# Altium PCB PCB1.PcbDoc (part 1 of 2)
Units mil, origin at the board's own origin, x right, y up, seen from the top; angles counter-clockwise.
Board outline 5700 x 5590 mil, 2 copper layers (Top Layer, Bottom Layer); 82 components, 63 nets, 275 pads, 102 vias.
Unrouted connection lines stored in the file: 1.
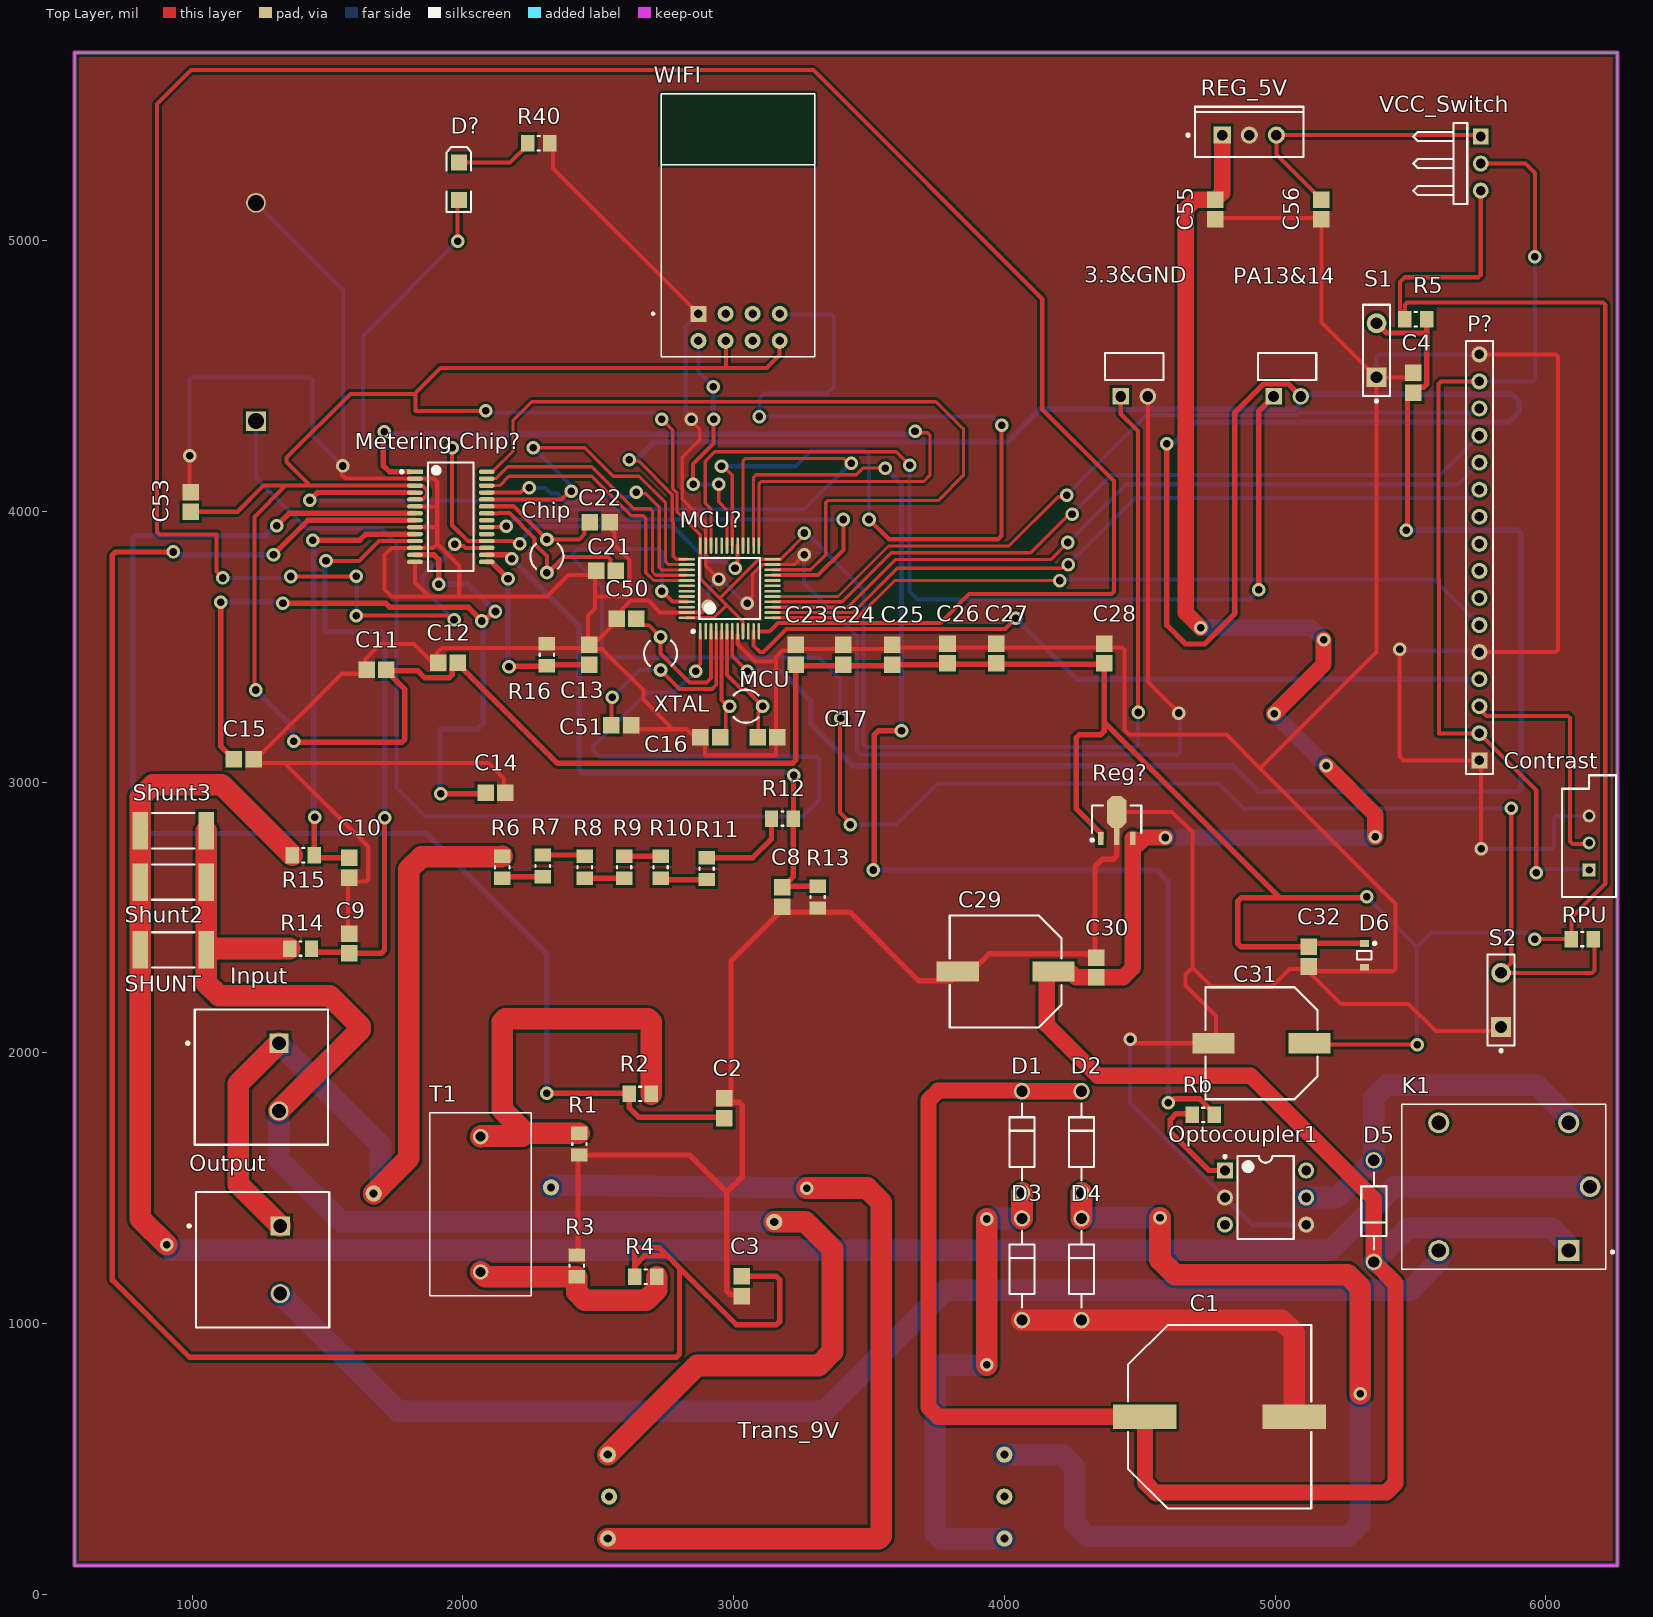
[diagram p0: Top Layer view]
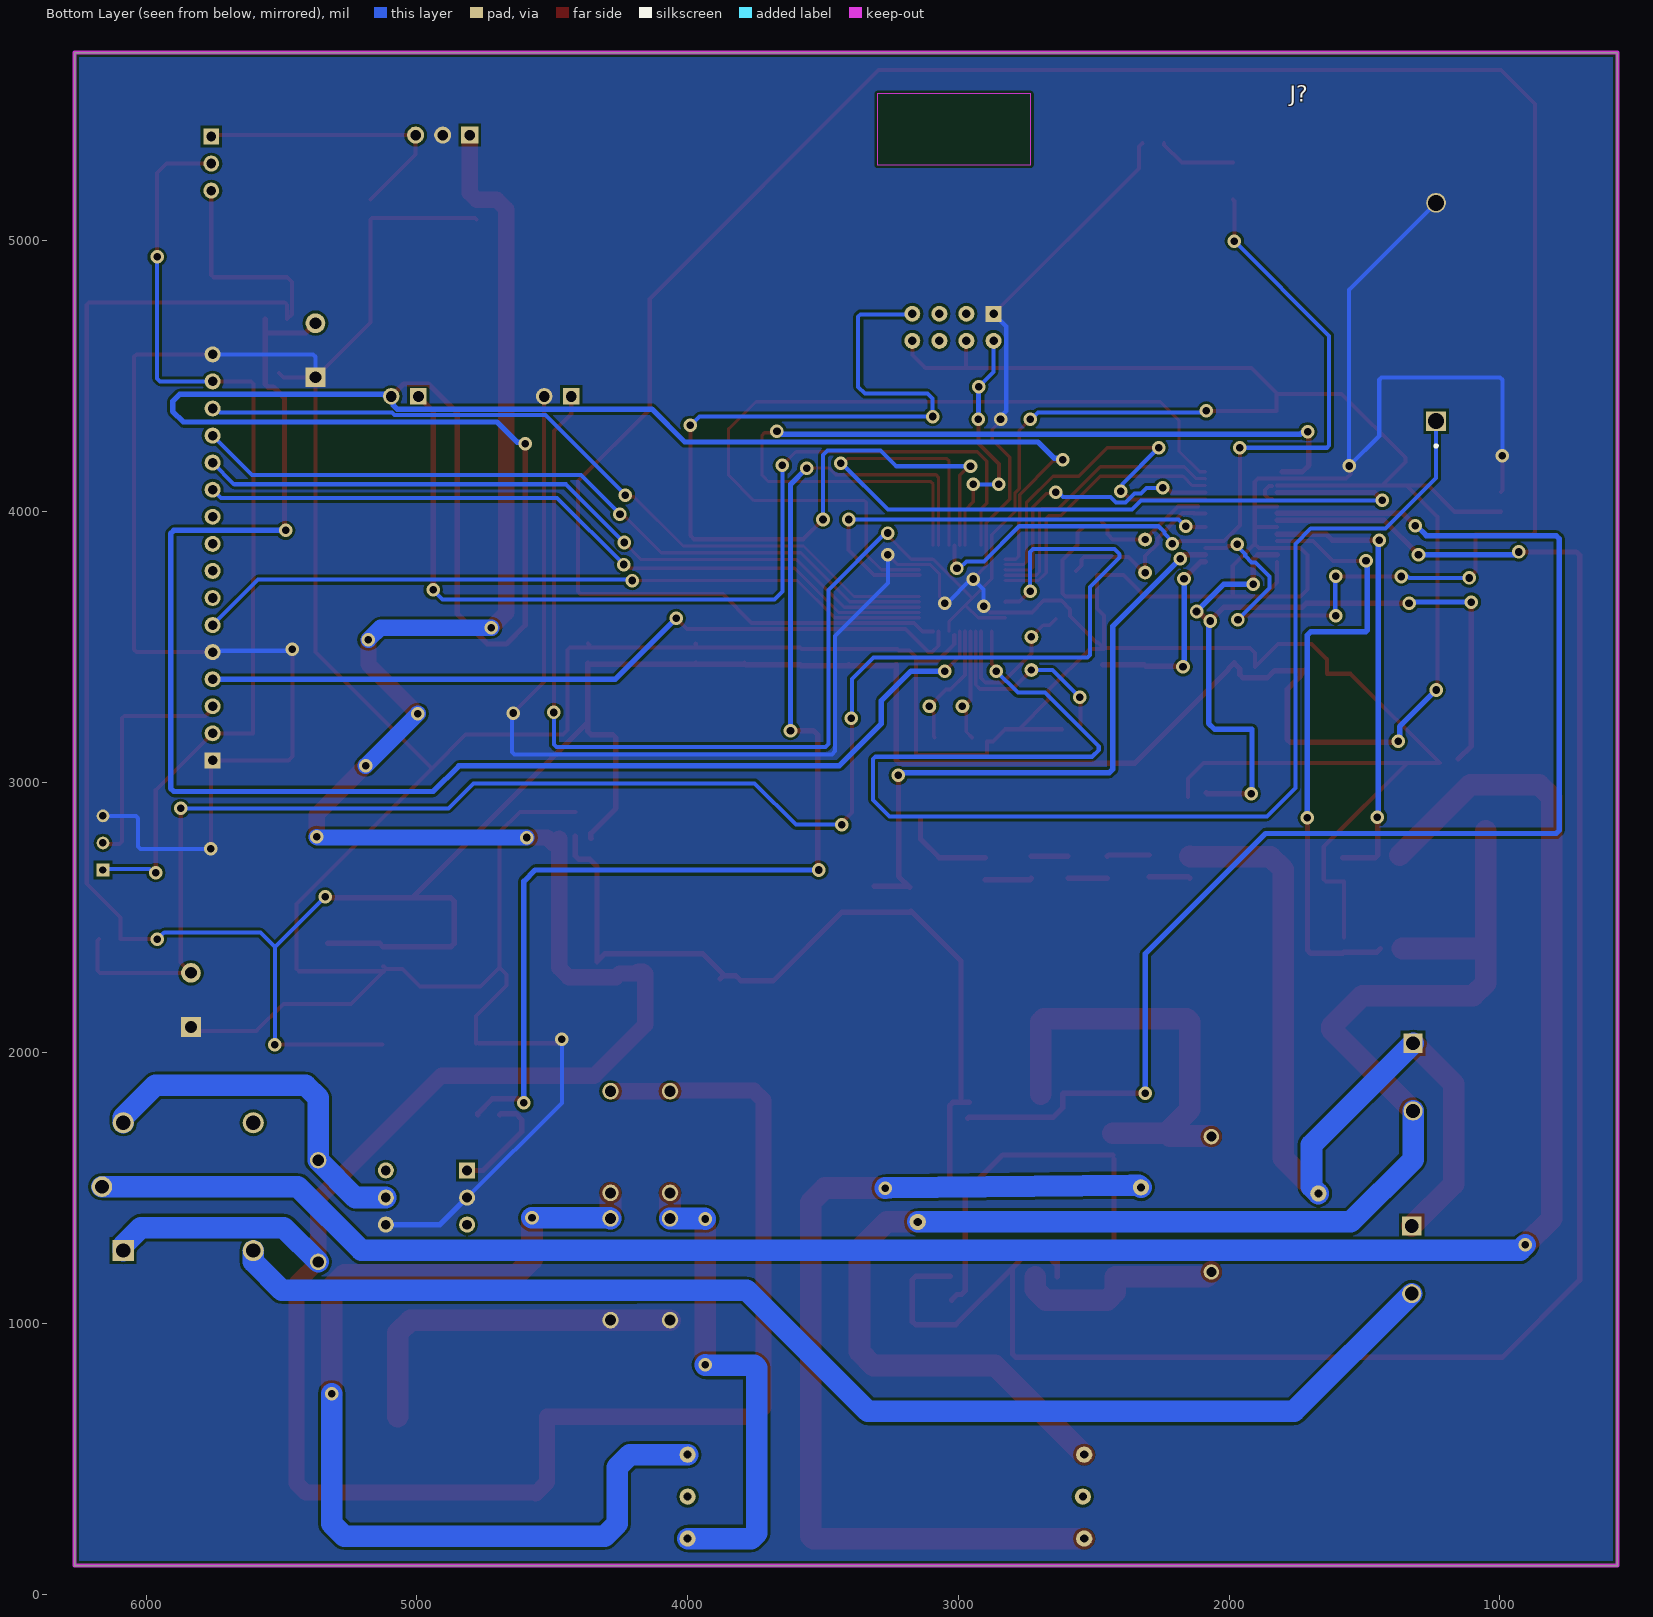
[diagram p1: Bottom Layer view, seen from below]

## Layer stack, top to bottom
Top Solder: solder mask 0.4, Solder Resist, Dk 3.5
Top Layer: signal copper 1.4
Dielectric 1: dielectric 12.6, FR-4, Dk 4.8
Bottom Layer: signal copper 1.4
Bottom Solder: solder mask 0.4, Solder Resist, Dk 3.5

## Board outline
565,105 6265,105 6265,5695 565,5695

## Design rules (kind name [scope] priority, off if disabled: settings)
Clearance Clearance_4 [InNamedPolygon('AGND_L02_P006')] p1: gap=10 ignorepadtopadclearanceinfootprint=FALSE
Clearance Clearance_3 [InNamedPolygon('AGND_L01_P005')] p2: gap=10 ignorepadtopadclearanceinfootprint=TRUE
Clearance Poly_Bot [InNamedPolygon('NONET_L01_P006')] p3: gap=19.68 ignorepadtopadclearanceinfootprint=TRUE
Clearance PolyTop [InNamedPolygon('AGND_L01_P005')] p4: gap=0.5 ignorepadtopadclearanceinfootprint=TRUE
Clearance Clearance_2 [InNamedPolygon('NONET_L01_P004')] p5: gap=10 ignorepadtopadclearanceinfootprint=FALSE except(0: Arc-Hole Track-Hole SMDPad-Hole THPad-Hole Via-Hole Fill-Hole Poly-Hole Region-Hole Text-Hole)
Clearance Clearance_1 [InNamedPolygon('NONET_L01_P001')] p6: gap=10 ignorepadtopadclearanceinfootprint=FALSE except(0: Arc-Hole Track-Hole SMDPad-Hole THPad-Hole Via-Hole Fill-Hole Poly-Hole Region-Hole Text-Hole)
Clearance poly_top [InNamedPolygon('NONET_L01_P000')] p7: gap=10 ignorepadtopadclearanceinfootprint=FALSE except(0: Arc-Hole Track-Hole SMDPad-Hole THPad-Hole Via-Hole Fill-Hole Poly-Hole Region-Hole Text-Hole)
Clearance [All] p8: gap=5.1 ignorepadtopadclearanceinfootprint=TRUE
PolygonConnect [All] p1: connectstyle=Direct reliefconductorwidth=10 reliefentries=4 polygonreliefangle="90 Angle" airgapwidth=10
RoutingVias [All] p1: holewidth=28 width=50 viastyle="Through Hole" minholewidth=28 minwidth=50 maxholewidth=28 maxwidth=50
SolderMaskExpansion [All] p1: expansion=4 istentingtop=FALSE
Width Power2 [InNet('L2')] p1: maxlimit=100 minlimit=80 preferedwidth=80
Width Power [InNet('L1')] p2: maxlimit=100 minlimit=80 preferedwidth=80
Width [All] p3: maxlimit=100 minlimit=12 preferedwidth=15
30 further rules are at their usual default settings.

## Components (designator, comment, footprint, x,y, rotation, side; value= is the part's Value field where it differs from the comment)
3.3&GND "Header_2" SMTC-TSW-102-08-X-S-RA 4430,4425 r0 top
C1 "2200uF" PNSC-EEV-FK1J471M_L 4795,655 r0 top
C2 "33nF" CAPC2013X94X50ML20T25 2965,1795 r90 top
C3 "33nF" CAPC2013X94X50ML20T25 3030,1137.6 r90 top
C4 "100nF" CAPC2013X94X50ML20T25 5510,4475 r90 top
C8 "33nF" CAPC2013X94X50ML20T25 3180,2575 r270 top
C9 "330nF" CAPC2013X94X50ML20T25 1580,2403.58 r90 top
C10 "330nF" CAPC2013X94X50ML20T25 1580,2683.58 r90 top
C11 "10u" CAPC2013X94X50ML20T25 1680,3415 r0 top
C12 "0.1uF" CAPC2013X94X50ML20T25 1945,3440 r0 top
C13 "33nF" CAPC2013X94X50ML20T25 2466.42,3470.35 r90 top
C14 "33nF" CAPC2013X94X50ML20T25 2120,2960 r0 top
C15 "33nF" CAPC2013X94X50ML20T25 1190,3085 r0 top
C16 "20pF" CAPC2013X94X50ML20T25 2913.58,3165 r0 top
C17 "20pF" CAPC2013X94X50ML20T25 3125,3165 r0 top
C21 "12PF" CAPC2013X94X50ML20T25 2528.58,3780 r0 top
C22 "12PF" CAPC2013X94X50ML20T25 2505,3960 r180 top
C23 "10uF" CAPC2013X94X50ML20T25 3230,3470 r90 top
C24 "100nF" CAPC2013X94X50ML20T25 3405,3470 r90 top
C25 "10uF" CAPC2013X94X50ML20T25 3585,3470 r90 top
C26 "100nF" CAPC2013X94X50ML20T25 3790,3475 r90 top
C27 "10uF" CAPC2013X94X50ML20T25 3970,3475 r90 top
C28 "100nF" CAPC2013X94X50ML20T25 4368.58,3475 r90 top
C29 "200uF" PNSC-EEE-TG1V221UP_L 4005,2300 r180 top
C30 "0.1uF" CAPC2013X94X50ML20T25 4340,2315 r270 top
C31 "100uF" PNSC-EEE-TG1V221UP_L 4950,2035 r180 top
C32 "0.1uF" CAPC2013X94X50ML20T25 5125,2355 r90 top
C50 "20pF" CAPC2013X94X50ML20T25 2603.84,3602.41 r180 top
C51 "20pF" CAPC2013X94X50ML20T25 2585,3210 r0 top
C53 "0.1uF" CAPC2013X94X50ML20T25 995,4035 r90 top
C55 "0.1uF" CAPC2013X94X50ML20T25 4780,5115 r90 top
C56 "0.22uF" CAPC2013X94X50ML20T25 5171.42,5115 r90 top
Chip "8.192MHz" R38 2310,3835 r0 top
Contrast "RPot" VR5 6160,2775 r90 top value=1K
D1 "1N4007" ONSC-AXIAL_LEAD-2-59-10_P 4065,1670 r270 top
D2 "1N4007" ONSC-AXIAL_LEAD-2-59-10_P 4285,1670 r270 top
D3 "1N4007" ONSC-AXIAL_LEAD-2-59-10_P 4065,1200 r270 top
D4 "1N4007" ONSC-AXIAL_LEAD-2-59-10_P 4285,1200 r270 top
D5 "1N4007" ONSC-AXIAL_LEAD-2-59-10_P 5365,1415 r90 top
D6 "MM3Z3V3T1G" ONSC-SOD-323-2-477-02_V 5330,2360 r270 top
D? "LED2" 3.2X1.6X1.1 1985,5220 r90 top
Input "screw_terminal 1" PHOE-1714955_V 1320,1910 r270 top
J? "Battery_Holder" KEYSTONE-1025-7-2_V 1235,4736.65 r180 bottom
K1 "Relay" RELAY_SRD-05VDC-SL-C 5845,1505 r180 top
MCU "8MHz" R38 3046.02,3280 r270 top
MCU? "STM32F103C8T6" STM-LQFP48_L 2985,3715 r90 top
"Metering Chip?" "ATM90E26-YU-B" FP-28Y-IPC_C 1955,3980 r0 top
Optocoupler1 "4N37" LTST-DIP-6_A 4965,1465 r0 top
Output "Screw_terminal 2" PHOE-1714955_V 1325,1235 r270 top
P? "LCD1602" HDR1X16 5755,3080 r90 top
PA13&14 "Header_2.1" SMTC-TSW-102-08-X-S-RA 4995,4425 r0 top
R1 "2.4" RESC2013X50X30ML20T20 2430,1662.6 r90 top
R2 "1K" RESC2013X50X30ML20T20 2655,1847.6 r0 top
R3 "2.4" RESC2013X50X30ML20T20 2420,1212.6 r90 top
R4 "1K" RESC2013X50X30ML20T20 2675,1172.6 r0 top
R5 "120K" RESC2013X50X30ML20T20 5520,4710 r180 top
R6 "120K" RESC2013X50X30ML20T20 2145,2685 r90 top
R7 "120K" RESC2013X50X30ML20T20 2295,2690 r90 top
R8 "120K" RESC2013X50X30ML20T20 2450,2685 r90 top
R9 "120K" RESC2013X50X30ML20T20 2595,2685 r90 top
R10 "120K" RESC2013X50X30ML20T20 2730,2685 r90 top
R11 "120K" RESC2013X50X30ML20T20 2900,2680 r90 top
R12 "120K" RESC2013X50X30ML20T20 3180,2865 r0 top
R13 "1K" RESC2013X50X30ML20T20 3310,2575 r90 top
R14 "100" RESC2013X50X30ML20T20 1400,2385 r0 top
R15 "100" RESC2013X50X30ML20T20 1409.65,2730 r0 top
R16 "1K" RESC2013X50X30ML20T20 2310,3470.35 r270 top
R40 "1K" RESC2013X50X30ML20T20 2280,5360 r180 top
Rb "100" RESC2013X50X30ML20T20 4735,1770 r0 top
Reg? "L78L33ACUTR" SOT-89_L 4415,2858.5 r90 top
REG_5V "7805CT" FAIR-TO-220-3 4905,5390 r90 top
RPU "1K" RESC2013X50X30ML20T20 6135,2420 r180 top
S1 "SW-PB" SPST-2 5375,4595 r90 top
S2 "SW-PB" SPST-2 5835,2195 r90 top
SHUNT "500u" FP-CRCW2512-e3-MFG 930,2380 r180 top
Shunt2 "500u" FP-CRCW2512-e3-MFG 930,2630 r180 top (schematic designator SHUNT2)
Shunt3 "1000u" FP-CRCW2512-e3-MFG 930,2820 r180 top (schematic designator SHUNT3)
T1 "CT_AX-0500" INDRR1270W55L1720T953H2040_AX-0500 2065,1440 r270 top
Trans_9V "Transformer" PCBComponent_1 2535,205 r0 top
VCC_Switch "Switch_3Pin" HDR1X3H 5760,5385 r270 top
WIFI "Wifi_Module" XCVR_ESP8266-01/ESP-01 3020,5057.17 r0 top
XTAL "32.768MHz" R38 2730,3475 r180 top (schematic designator RTC_XTAL)

## Footprints (in the part's own frame and the unit in brackets; to place one, negate y for a bottom-side part, rotate by r counter-clockwise, add the part's x,y. Pads: shape width x height; smd on the part's side, far side on the other; paste and mask are expansions set on the pad)
3.2X1.6X1.1 [mm] "SMT LED; 2 Flat Leads"
  rect 1.5x1.5 smd: 1(-1.75,0) 2(1.75,0)
  silkscreen extent -2.9,-1.15 3.2,1.15
CAPC2013X94X50ML20T25 [mm] "Chip Capacitor, 2-Leads, Body 2.01x1.25mm, IPC Low Density"
  rect 1.55x1.55 smd: 1(-0.925,0) 2(0.925,0)
  body extent -1.1,-0.72 1.11,0.72, height 0.94
FAIR-TO-220-3 [mm] "FM, 3-Leads, Body 10.2x4.7mm, Pitch 2.54mm"
  rect 1.6x1.6 hole 1: 1(0,2.54)
  round 1.6 hole 1: 2(0,0) 3(0,-2.54)
  silkscreen extent -2.04,-5.1 2.66,5.87, body extent -2.04,-5.1 2.66,5.1, height 18.95
FP-28Y-IPC_C [mm]
  rect 1.482x0.418 smd paste+0 mask+0: 1(-3.364,4.225)
  rrect100% 1.482x0.418 smd paste+0 mask+0: 2(-3.364,3.575) 3(-3.364,2.925) 4(-3.364,2.275) 5(-3.364,1.625) 6(-3.364,0.975) 7(-3.364,0.325) 8(-3.364,-0.325) 9(-3.364,-0.975) 10(-3.364,-1.625) 11(-3.364,-2.275) 12(-3.364,-2.925) 13(-3.364,-3.575) 14(-3.364,-4.225) 15(3.364,-4.225) 16(3.364,-3.575) 17(3.364,-2.925) 18(3.364,-2.275) 19(3.364,-1.625) 20(3.364,-0.975) 21(3.364,-0.325) 22(3.364,0.325) 23(3.364,0.975) 24(3.364,1.625) 25(3.364,2.275) 26(3.364,2.925) 27(3.364,3.575) 28(3.364,4.225)
  silkscreen extent -4.73,-5.1 2.12,5.1, body extent -4.2,-5.2 4.2,5.2, height 0.25
FP-CRCW2512-e3-MFG [mm]
  rect 1.45x3.5 smd paste+0 mask+0: 1(-3.1,0) 2(3.1,0)
  silkscreen extent -2,-1.65 2,1.65, body extent -3.93,-1.85 3.93,1.85, height 0.25
HDR1X3H [mm] "Connector; Header; 3 Position; Right Angle"
  rect 1.5x1.5 hole 0.9: 1(0,0)
  round 1.5 hole 0.9: 2(2.54,0) 3(5.08,0)
  silkscreen extent -1.27,-6.35 6.35,-1.27
HDR1X16 [mm] "Connector; Header; 16 Position"
  rect 1.5x1.5 hole 0.9: 1(0,0)
  round 1.5 hole 0.9: 2(2.54,0) 3(5.08,0) 4(7.62,0) 5(10.16,0) 6(12.7,0) 7(15.24,0) 8(17.78,0) 9(20.32,0) 10(22.86,0) 11(25.4,0) 12(27.94,0) 13(30.48,0) 14(33.02,0) 15(35.56,0) 16(38.1,0)
  silkscreen extent -1.27,-1.27 39.37,1.27
INDRR1270W55L1720T953H2040_AX-0500 [mm]
  round 1.458 hole 0.95: 1(-6.35,0) 3(6.35,0)
  silkscreen extent -8.6,-4.77 8.6,4.77, body extent -8.6,-4.76 8.6,4.76, height 20.66
KEYSTONE-1025-7-2_V [mm] "SON, 10-Leads, Body 2.5 x 2.5 mm, Pitch 0.5 mm, Thermal Pad 2 x 1.2 mm"
  rect 1.85x1.85 hole 1.5: 1(0,-10.245)
  round 1.85 hole 1.5: 2(0,10.245)
  silkscreen extent -0.12,-12.69 0.13,-12.45, body extent -13.88,-12.13 13.88,18.84, height 12.58
LTST-DIP-6_A [mm] "DIP, 6-Leads, Body 7.8x7mm, Pitch 2.54mm"
  rect 1.5x1.5 hole 0.9: 1(-3.81,2.54)
  round 1.5 hole 0.9: 2(-3.81,0) 3(-3.81,-2.54) 4(3.81,-2.54) 5(3.81,0) 6(3.81,2.54)
  silkscreen extent -3.93,-3.9 2.65,3.96, body extent -3.95,-3.9 3.95,3.9, height 4.5
ONSC-AXIAL_LEAD-2-59-10_P [mm] "AXIAL, 2-Leads, Diameter 2.35mm"
  round 1.55 hole 1.05: 1(-4.77,0) 2(4.77,0)
  silkscreen extent -3.6,-1.18 3.6,1.18
ONSC-SOD-323-2-477-02_V [mm] "SOD, 2-Leads, Body 1.7x1.25mm"
  rect 0.63x0.83 smd: 1(-1.115,0) 2(1.115,0)
  silkscreen extent -1.24,-0.67 0.4,1.09, body extent -0.85,-0.63 0.85,0.63, height 1.06
PCBComponent_1 [mil]
  round 60 hole 30: 50(0,0) 51(0,310) 52(1465,310) 53(1465,0)
PHOE-1714955_V [mm] "Terminal Block, 2-Leads, Body 12.7x12.5mm, Pitch 6.35mm"
  rect 1.8x1.8 hole 1.3: 1(-3.175,0)
  round 1.8 hole 1.3: 2(3.175,0)
  silkscreen extent -6.35,-8.67 6.35,4.6, body extent -6.92,-7.9 6.35,4.6, height 21.51
PNSC-EEE-TG1V221UP_L [mm] "Aluminum Electrolytic Capacitor, Body 10.5x10.5mm, IPC High Density"
  rect 3.95x1.9 smd: 1(-4.5,0) 2(4.5,0)
  silkscreen extent -5.25,-5.25 5.25,5.25, body extent -6,-5.25 6,5.25, height 10.5
PNSC-EEV-FK1J471M_L [mm] "CAPAE, 2-Leads, Body 17.2x17.2mm, IPC High Density"
  rect 5.95x2.3 smd: 1(-7,0) 2(7,0)
  silkscreen extent -8.6,-8.6 8.6,8.6, body extent -9.5,-8.6 9.5,8.6, height 17
R38 [mm] "Crystal, Thru-Hole; 2 Leads; Body 3.1 x 8.2 mm (Dia.xH)"
  round 1.3 hole 0.7: 1(0,1.55) 2(0,-1.55)
  silkscreen extent -1.55,-1.19 1.55,1.17
RELAY_SRD-05VDC-SL-C [mm]
  rect 1.98x1.98 hole 1.32: A1(-6.1,6)
  round 1.98 hole 1.32: A2(-6.1,-6) NC(6.1,6) NO(6.1,-6)
  round 1.935 hole 1.29: COM(-8.1,0)
  silkscreen extent -10.3,-7.75 9.55,7.75, body extent -10.01,-7.37 8.99,7.63, height 16.15
RESC2013X50X30ML20T20 [mm] "Chip Resistor, 2-Leads, Body 2.00x1.25mm, IPC Low Density"
  rect 1.25x1.55 smd: 1(-1.025,0) 2(1.025,0)
  silkscreen extent -0.1,-0.67 0.1,0.67, body extent -1.1,-0.72 1.1,0.72, height 0.5
SMTC-TSW-102-08-X-S-RA [mm] ".025 SQ Post Terminal Strip Assembly, 1x2 Pins, Right Angle, 2.54mm Pitch, Male"
  rect 1.55x1.55 hole 1.02: 1(0,0)
  round 1.55 hole 1.02: 2(2.54,0)
  silkscreen extent -1.46,1.52 4,4.06, body extent -1.27,-0.32 3.81,9.9, height 3.05
SOT-89_L [mm] "SOT89, 3-Leads, Body 4.5x2.4 mm, Pitch 1.5mm, Lead Span 4.1mm, IPC High Density"
  rect 1.2x0.5 smd: 1(-1.7,1.5) 3(-1.7,-1.5)
  rect 1.6x0.5 smd: 2(-1.5,0)
  oct 3x1.8 smd: 2(0.8,0)
  silkscreen extent -1.97,-2.3 1.4,2.42, body extent -1.2,-2.3 1.4,2.3, height 1.6
SPST-2 [mm] "Switch; 2 Leads"
  rect 1.85x1.85 hole 1.1: 1(-2.54,0)
  round 1.85 hole 1.1: 2(2.54,0)
  silkscreen extent -4.89,-1.27 4.28,1.27
STM-LQFP48_L [mm] "QFP, 48-Leads, Body 7x7mm, Pitch 0.5mm, IPC High Density"
  oval 1.55x0.25 smd: 1(-4.025,2.75) 2(-4.025,2.25) 3(-4.025,1.75) 4(-4.025,1.25) 5(-4.025,0.75) 6(-4.025,0.25) 7(-4.025,-0.25) 8(-4.025,-0.75) 9(-4.025,-1.25) 10(-4.025,-1.75) 11(-4.025,-2.25) 12(-4.025,-2.75) 25(4.025,-2.75) 26(4.025,-2.25) 27(4.025,-1.75) 28(4.025,-1.25) 29(4.025,-0.75) 30(4.025,-0.25) 31(4.025,0.25) 32(4.025,0.75) 33(4.025,1.25) 34(4.025,1.75) 35(4.025,2.25) 36(4.025,2.75)
  oval 0.25x1.55 smd: 13(-2.75,-4.025) 14(-2.25,-4.025) 15(-1.75,-4.025) 16(-1.25,-4.025) 17(-0.75,-4.025) 18(-0.25,-4.025) 19(0.25,-4.025) 20(0.75,-4.025) 21(1.25,-4.025) 22(1.75,-4.025) 23(2.25,-4.025) 24(2.75,-4.025) 37(2.75,4.025) 38(2.25,4.025) 39(1.75,4.025) 40(1.25,4.025) 41(0.75,4.025) 42(0.25,4.025) 43(-0.25,4.025) 44(-0.75,4.025) 45(-1.25,4.025) 46(-1.75,4.025) 47(-2.25,4.025) 48(-2.75,4.025)
  silkscreen extent -4.15,-2.85 2.85,3.55, body extent -3.5,-3.5 3.5,3.5, height 1.6
VR5 [mm] "Thru-Hole; 3 Leads"
  rect 1.2x1.2 hole 0.7: 1(-2.54,0)
  round 1.2 hole 0.7: 2(0,0) 3(2.54,0)
  silkscreen extent -5.08,-2.54 6.35,2.54
XCVR_ESP8266-01/ESP-01 [mm]
  rect 1.5x1.5 hole 0.8: 1(-3.81,-8.31)
  round 1.5 hole 0.8: 2(-1.27,-8.31) 3(1.27,-8.31) 4(3.81,-8.31) 5(-3.81,-10.85) 6(-1.27,-10.85) 7(1.27,-10.85) 8(3.81,-10.85)
  Keep-Out Layer region: 7.09,5.65 -7.31,5.65 -7.31,12.35 7.09,12.35
  Keep-Out Layer region: 7.09,5.65 -7.31,5.65 -7.31,12.35 7.09,12.35
  silkscreen extent -8.16,-12.35 7.09,12.35, body extent -7.2,-12.35 7.2,12.35, height 6.5

## Part data
3.3&GND PA13&14: library part CMP-1024-00319-1, "0.025\" SQ Post Header, Through-hole, Right Angle, -55 to 105 degC, 2.54 mm Pitch, 2-Pin, Male, RoHS", Manufacturer=Samtec, PartNumber=TSW-102-08-T-S-RA, Temperature Range="-55 to 105 degC", ComponentLink1Description="Manufacturer URL", ComponentLink1URL=http://www.samtec.com, ComponentLink2Description=Datasheet, ComponentLink2URL=http://www.samtec.com/documents/webfiles/pdf/TSW_TH.PDF, ComponentLink3Description="Package Specification", ComponentLink3URL=http://www.samtec.com/documents/webfiles/cpdf/TSW-XXX-XX-XXX-X-XX-XXX-MKT.pdf, DatasheetVersion=F-214, Mounting Technology=Through-hole, Orientation="Right Angle", PackageDescription=".025[0.64] SQ. Post Terminal Strip Assembly", PackageReference=TSW-102-08-X-S-RA, PackageVersion="DM, 8/1988", Pitch="2.54 mm", RoHS=True
C1: library part CMP-1665-00018-3, "Aluminum Electrolytic Capacitor (SMD Type), 470 uF, 63 V, -55 to 105 degC, 2-Pin CAPAE, RoHS, Tape and Reel", Manufacturer=Panasonic, Max Operating Temperature="105 degC", Min Operating Temperature="-55 degC", Package Quantity=125, Voltage Rating="63 V", ComponentLink1Description="Manufacturer URL", ComponentLink1URL=http://www.panasonic.com/, ComponentLink2Description=Datasheet, ComponentLink2URL=https://industrial.panasonic.com/cdbs/www-data/pdf/RDE0000/ABA0000C1181.pdf, DatasheetVersion=03/2016, Height="16.5 mm", Length="17 mm", Mount="Surface Mount", Mounting Technology="Surface Mount", PackageDescription="2-Pin Electrolytic Aluminum Capacitor, Body 17 x 17 mm", PackageReference=EEV-FK1J471M, Packaging="Tape and Reel", Pins=2, REACH SVHC=Unknown, RoHSCompliant=true
C2 C3 C4 C8 C9 C10 C11 C12 C13 C14 C15 C16 C17 C21 C22 C23 C24 C25 C26 C27 C28 C30 C32 C50 C51 C53 C55 C56: library part CMP-2007-04307-1, Manufacturer="AVX Interconnect / Elco", Part Number=08055A271FAT2A
C29 C31: library part CMP-2000-06220-1, "Aluminum Electrolytic Capacitor, 220 uF, 20%, 35 V, -40 to 125 degC, 2-Pin SMD, RoHS, Tape and Reel", Capacitance=220µF, Case Size/Dimension=Ø10x10.2mm, ESR (Equivalent Series Resistance)=0.3O, Lifetime@Temperature=2000Hrs@125°C, Manufacturer=Panasonic, Operating Temp Range=-40to+125°C, Operating Temp-Max=125°C, Package Description="2-Pin Surface Mount Device, Body 10.3 x 10.3 mm", Package Reference=EEE-TG1V221UP, Rated Voltage=35V, Ripple Current=270mA, Datasheet URL=http://datasheet.octopart.com/EEE-TG1V221UP-Panasonic---ECG-datasheet-10851968.pdf, Datasheet Version=09/2011, Manufacturer URL=http://www.panasonic.com/, Mounting Technology=SurfaceMount, Series=TG, Type=Can
Chip MCU XTAL: library part XTAL, "Crystal Oscillator", LatestRevisionDate=17-Jul-2002, LatestRevisionNote="Re-released for DXP Platform.", PackageDescription="Crystal, Thru-Hole; 2 Leads; Body 3.1 x 8.2 mm (Dia.xH)", PackageReference=R38, Published=8-Jun-2000, Publisher="Altium Limited"
Contrast: "Potentiometer", LatestRevisionDate=17-Jul-2002, LatestRevisionNote="Re-released for DXP Platform.", PackageDescription="Variable Resistor, Thru-Hole; 3 Leads", PackageReference=VR5, Published=8-Jun-2000, Publisher="Altium Limited", Set Position=0.5, Sim Note="Enter the Resistance value and the set point into parameter fields."
D1 D2 D3 D4 D5: library part CMP-0902-00142-1, "Standard Recovery Rectifier, 2-Pin Axial_Lead, Pb-Free, Bulk Bag", Manufacturer="On Semiconductor", ComponentLink1Description="Manufacturer URL", ComponentLink1URL=http://www.onsemi.com/, ComponentLink2Description=Datasheet, ComponentLink2URL=http://www.onsemi.com/pub_link/Collateral/1N4001-D.PDF, ComponentLink3Description="Package Specification", ComponentLink3URL=http://www.onsemi.cn/pub_link/Collateral/59-10.PDF, DatasheetVersion="Rev. 13", IFSM Max (A)=30, IO(rec) Max (A)=1, Mounting Technology="Through Hole", PackageDescription="2-Pin, Axial Lead, Diameter 2.35 mm", PackageReference=AXIAL_LEAD-2-59-10, PackageVersion="Rev. U, 02/2005", Packing="Bulk Bag", PartNumber=1N4007, RoHS=TRUE, Type="Standard Recovery", VRRM Max (V)=1000
D6: library part CMP-1060-00672-1, "Zener Voltage Regulator, 300 mW, 2-Pin SOD-323, Pb-Free, Tape and Reel", Manufacturer="On Semiconductor", ComponentLink1Description="Manufacturer URL", ComponentLink1URL=http://www.onsemi.com/, ComponentLink2Description=Datasheet, ComponentLink2URL=http://www.onsemi.cn/pub_link/Collateral/MM3Z2V4T1-D.PDF, ComponentLink3Description="Package Specification", ComponentLink3URL=http://www.onsemi.com/pub_link/Collateral/477-02.PDF.1, DatasheetVersion="Rev. 9", Mounting Technology="Surface Mount", P Max (W)=0.3, PackageDescription="2-Pin SOD, Body 1.7 x 1.25 mm", PackageReference=SOD-323-2-477-02, PackageVersion="Rev. H, 03/2007", Packing="Tape and Reel", PartNumber=MM3Z3V3T1G, RoHS=Pb-Free, VZ Typ (V)=3.3
D?: "Typical RED, GREEN, YELLOW, AMBER GaAs LED", LatestRevisionDate=17-Jul-2002, LatestRevisionNote="Re-released for DXP Platform.", PackageDescription="SM LED; 2 Flat Leads", PackageReference=3.2X1.6X1.1, PackageVersion=Feb-2002, Published=8-Jun-2000, Publisher="Altium Limited"
Input Output: library part CMP-2000-05797-1, "PC Terminal Block, Pitch 6.35 mm, 1 x 2 Position, Height 21.5 mm, Tail Lenght 5.1 mm, RoHS, Bulk", Manufacturer="Phoenix Contact", Package Description="PC Terminal Block, Pitch 6.35 mm, 1 x 2 Position, Height 21.5 mm, Tail Lenght 5.1 mm", Package Reference=1714955, Datasheet URL=http://media.digikey.com/pdf/Data%20Sheets/Phoenix%20Contact%20PDFs/1714955.pdf, Datasheet Version=02/2010, Manufacturer URL=http://www.phoenixcontact.com/, Mounting Technology=ThroughHole
J?: library part CMP-0465-00001-2, "Holder for 2477 or 2430 Cells P/N 1025-7, Body 27.762 x 30.963 mm, THM", Manufacturer=Keystone, PartNumber=1025-7, Switch Current Limit (Typ) (A)=1, # of Cells=1, Cell Size="24 mm", ComponentLink1Description="Manufacturer URL", ComponentLink1URL=http://www.keyelco.com/, ComponentLink2Description=Datasheet, ComponentLink2URL=http://www.keyelco.com/product-pdf.cfm?p=3950, DatasheetVersion=Rev.C, Material=Plastic, Mounting Technology="Through Hole", PackageDescription="2-Pin Hand Drawn, Body 27.762 x 30.963 mm", PackageReference=KEYSTONE-1025-7-2, Type=HOLDER
K1: library part SRD-05VDC-SL-C, "5V Trigger Relay Module For Arduino And Raspberry Pi 5V Trigger Relay Module For Arduino And Raspberry Pi", Package=None, Availability="Not in stock", Check_prices=https://www.snapeda.com/parts/SRD-05VDC-SL-C/Songle+Relay/view-part/?ref=eda, MF="Songle Relay", MP=SRD-05VDC-SL-C, Price=None, SnapEDA_Link=https://www.snapeda.com/parts/SRD-05VDC-SL-C/Songle+Relay/view-part/?ref=snap
MCU?: library part CMP-0237-00215-3, "ARM Cortex-M3 32-bit MCU, 64 KB Flash, 20 KB Internal RAM, 37 I/Os, 48-pin LQFP, -40 to 85 degC, Tray", I/Os (High Current)=37, Operating Frequency(F) (Processor speed) (MHz)=72, Supply Voltage(Vcc) min (V)=2, A/D Converter="2x12-bit (10 Channel)", ComponentLink1Description="Manufacturer URL", ComponentLink1URL=http://www.st.com/web/en/home.html, ComponentLink2Description=Datasheet, ComponentLink2URL=http://www.st.com/st-web-ui/static/active/en/resource/technical/document/datasheet/CD00161566.pdf, ComponentLink3Description="Package Specification", ComponentLink3URL=http://www.st.com/st-web-ui/static/active/en/resource/technical/document/datasheet/DM00058181.pdf, Core="ARM Cortex-M3", DatasheetVersion="Rev. 16", FLASH Size (Prog) (kB)=64, Internal RAM Size (kB)=20, Mounting Technology="Surface Mount", PackageDescription="48-Pin Low Profile Quad Flat Package, 7 x 7 mm Body, 0.5 mm Pitch", PackageReference=LQFP48, PackageVersion="Rev. 6, 06/2013", Packing=Tray, PartNumber=STM32F103C8T6
"Metering Chip?": library part CMP-06317-000007-1, "IC ENERGY METER 1.8V/3V 28SSOP", Case/Package=SSOP, Max Operating Temperature=85°C, Min Operating Temperature=-40°C, Mount="Surface Mount", Packaging=Bulk, RoHS Compliant=Yes
Optocoupler1: library part CMP-2000-05615-1, "Photocoupler - Phototransistor Output, 1500 Vrms, -55 to 100 degC, 6-Pin DIP, RoHS, Tube", Current Transfer Ratio=50%, Forward Current=60mA, Isolation Voltage=5000Vrms, Manufacturer=Vishay, Maximum Collector Current=100mA, Maximum Collector Emitter Voltage=30V, Maximum Forward Diode Voltage=1.5V, Maximum Operating Temperature=+100C, Maximum Power Dissipation=70mW, Maximum Reverse Diode Voltage=6V, Minimum Operating Temperature=-55C, Package / Case=PDIP-6, Package Description="6-Pin Double In-line Package, Body 7.3 x 6.5 mm, Pitch 2.54 mm", Package Reference=DIP-6, Brand=VishaySemiconductors, Configuration=1Channel, Datasheet URL=http://optoelectronics.liteon.com/upload/download/DS-70-99-0012/S_110_4N3X%20Series%201115.pdf, Datasheet Version="Rev. D, 12/2015", Factory Pack Quantity=3000, Input Type=DC, Manufacturer URL=http://www.us.liteon.com/, Maximum Input Diode Current=60mA, Mounting Technology=ThroughHole, Number of Channels=1Channel, Number of Channels per Chip=1Channel, Output Device=NPNPhototransistor, Output Type=DC, Packaging=Tube, Product Category=TransistorOutputOptocouplers, RoHS=Details
P?: library part "Header 16", "Header, 16-Pin", LatestRevisionDate=17-Jul-2002, LatestRevisionNote="Re-released for DXP Platform.", Publisher="Altium Limited"
R1 R2 R3 R4 R5 R6 R7 R8 R9 R10 R11 R12 R13 R14 R15 R16 R40 Rb RPU: library part CMP-1013-00031-2, Manufacturer="Vishay Dale", Part Number=CRCW080516R0JNEA
Reg?: library part CMP-0244-00409-1, "Positive Voltage Regulator, 3.3V, 4-Pin SOT-89, Tape and Reel", ComponentLink1Description="Manufacturer URL", ComponentLink1URL=http://www.st.com, ComponentLink2Description=Datasheet, ComponentLink2URL=http://www.st.com/internet/com/TECHNICAL_RESOURCES/TECHNICAL_LITERATURE/DATASHEET/CD00000446.pdf, DatasheetVersion=1/02/2011, PackageDescription="3-Pin SOT-89 Package 1.5 mm Pitch, 4.1 mm Lead Span", PackageReference=SOT-89, PackageVersion=2011
REG_5V: library part CMP-2000-04938-1, "Positive Voltage Regulator, 5 V, 1 A, -40 to 125 degC, 3-Pin TO-220, RoHS, Tube", Manufacturer=FairchildSemiconductor, Maximum Input Voltage=35V, Maximum Output Current=2.2(Typ)A, Maximum Quiescent Current=8mA, Operating Temperature=-40to125degC, Output Voltage=5V, Package=3TO-220AB, Package Description="3-Pin Through Hole Device, Body 10 x 4.5 mm, Pitch 2.54 mm", Package Reference=TO-220, Typical Dropout Voltage @ Current=2@1AV, Accuracy=±4%, Category=LinearRegulator, Datasheet URL=https://datasheet.ciiva.com/26904/lm7805ct-26904988.pdf, Datasheet Version=Aug-12, Line Regulation=100mV, Load Regulation=100mV, Manufacturer URL=https://www.fairchildsemi.com/, Mounting=ThroughHole, Number of Outputs=1, Output Type=Fixed, Package URL=https://www.fairchildsemi.com/package-drawings/TO/TO220B03.pdf, Packaging=Rail/Tube, Polarity=Positive, Rad Hard=No, Type=Linear
S1 S2: "Switch", LatestRevisionDate=17-Jul-2002, LatestRevisionNote="Re-released for DXP Platform.", PackageDescription="Switch; 2 Leads", PackageReference=SPST-2, Published=24-Mar-1999, Publisher="Altium Limited"
SHUNT Shunt2 Shunt3: library part CMP-02407-004199-1, "RES Thick Film, 100kΩ, 1%, 1W, 100ppm/°C, 2512", Case Code (Imperial)=2512, Case Code (Metric)=6432, Max Operating Temperature=155°C, Max Power Dissipation=1W, Min Operating Temperature=-55°C, Package Quantity=2000, Resistance=100kR, Temperature Coefficient=100ppm/°C, Tolerance=1%, Voltage Rating=500V, Case/Package=2512, Composition="Thick Film", Contact Plating=Tin, Depth=3.15mm, Features="Automotive AEC-Q200", Height=0.6mm, Lead Free="Lead Free", Length=6.3mm, Military Standard=Not, Number of Pins=2, Number of Terminations=2, Packaging="Tape and Reel", Power Rating=1W, Radiation Hardening=No, Termination=SMD/SMT, Voltage Rating (DC)=500V, Weight=0.001429oz, Width=3.15mm
T1: library part AX-0500, "5A Current Sense Transformer 50Hz ~ 60Hz Through Hole", Package="Talema Group LLC", Availability=Unavailable, MF="Talema Group LLC", MP=AX-0500, Price=None, SnapEDA_Link=https://www.snapeda.com/parts/AX-0500/Talema%20Group%20LLC/view-part/3208690/?ref=snap
Trans_9V: library part Component_1
VCC_Switch: library part "Header 3H", "Header, 3-Pin, Right Angle", LatestRevisionDate=17-Jul-2002, LatestRevisionNote="Re-released for DXP Platform.", Publisher="Altium Limited"
WIFI: library part ESP8266-01/ESP-01, "MakerFocus 4pcs ESP8266 ESP-01 Serial Wireless WiFi Transceiver Receiver Module 1MB SPI Flash DC3.0-3.6V Internet of Things WiFi Module Board Compatible with Ar duino", Package="Non-Standard AI-Thinker", Availability="Not in stock", Check_prices=https://www.snapeda.com/parts/ESP8266-01/ESP-01/AI-Thinker/view-part/?ref=eda, MF=AI-Thinker, MP=ESP8266-01/ESP-01, Price=None, SnapEDA_Link=https://www.snapeda.com/parts/ESP8266-01/ESP-01/AI-Thinker/view-part/?ref=snap

## Free pads (board coordinates)
  round 60 hole 30: 34(1670,1480) 35(2325.39,1502.63) 37(3150,1375) Mount(2540,360) Mount(4000,360)

## Via types
v1: diameter 50, hole 28, Top Layer to Bottom Layer, 102 vias

## Nets (pads, with @x,y where several pads share a name; then routed paths per layer and width w, separated by ;. In a path a pad name is that pad's centre, name@x,y a point inside that pad or via, vN(x,y) a via of type N, cw(c..) or ccw(c..) an arc to the next point about the centre after c; other vN are vias at no path point)
AGND: 3.3&GND.2 "Metering Chip?.2" "Metering Chip?.6" "Metering Chip?.9" "Metering Chip?.12" "Metering Chip?.14" C1.2 C2.2 C3.1 C4.2 C8.2 C9.2 C10.1 C11.1 C12.1 C13.2 C14.2 C15.2 C16.1 C17.2 C21.1 C22.1 C23.2 C24.2 C25.2 C26.2 C27.2 C28.2 C29.2 C30.1 C31.2 C32.1 C50.2 C51.2 C53.2 C55.1 C56.1 Contrast.3 D3.2 D4.2 D6.2 J?.2 MCU?.8 MCU?.23 MCU?.35 MCU?.47 Optocoupler1.2 Optocoupler1.4 P?.1 P?.5 P?.16 R1.1 R3.2 R13.1 R16.1 R40.1 Reg?.2 REG_5V.2 S1.1 S2.1 WIFI.1 | length 36779.1
  Top Layer w12: v1@2844.15,4339.27 2844.15,4333.81 2875,4302.95 2875,4265.26 2810,4200.26 2810,4045 2896.42,3958.58 2896.42,3798.58 v1(2945,3750) ; v1(3050,3660) 3050,3666.03 3070,3686.03 3070,3770 3103.58,3803.58 3223.58,3803.58 v1(3260,3840)
  Top Layer w14: 2333.13,5266.87 WIFI.1
  Top Layer w15: v1(990,4205) 990,4076.42 C53.2 ; v1@1551.35,4152.72 1551.35,4136.72 1567.32,4120.75 1822.56,4120.75 1893.28,4120.75 1905,4109.03 1905,4024.52 ; C9.2@1575,2425 1575,2632.17 1641.21,2632.17 1650,2640.95 1650,2761 1341,3070 ; 1822.56,3813.66 1822.56,3737.44 1875,3685 ; 1822.56,3941.61 1903.39,3941.61 1905,3940 ; 1822.56,4018.39 1898.87,4018.39 1905,4024.52 ; C14.2@2151.42,2945 2151.42,3013.58 2095,3070 1341,3070 ; R40.1 2333.13,5347.22 2333.13,5266.87 ; C22.1@2536.42,3945 2559.93,3921.49 2559.93,3875.07 2615,3820 2615,3696.72 2603.28,3685 2495.14,3685 2487.17,3692.98 ; C51.2@2616.42,3195 2776.32,3195 ; v1(2906.79,3650) 2883.21,3626.42 MCU?.47 2728.33,3626.42 2684.75,3670 2619.65,3670 2587.93,3638.28 2587.93,3612.93 2489.79,3514.78 2484.43,3514.78 C13.2@2461.42,3491.77 ; MCU?.8@3015,3543.18 3015,3509.76 3079.76,3445 3156.42,3445 ; C27.2 C27.2@3970,3496.42 ; C28.2 4363.58,3506.42 C28.2@4363.58,3496.42 ; Reg?.2@4415,2890 4620,2890 4695,2815 4695,2315 ; v1(4465,2050) 4480,2035 C31.2 ; 3.3&GND.2 4530,3370 v1(4645,3255) ; C55.1 4785,5083.58 5166.42,5083.58 C56.1 5171.42,4698.58 S1.1 5375,3480 4945,3050 ; C31.2@4782.05,2035 4782.05,2135 4669.17,2247.88 4669.17,2289.17 4695,2315 ; C32.1 5122.16,2318.58 C32.1@5113.58,2310 ; S1.1@5381.89,4495 5493.58,4495 C4.2 ; v1(5460,3490) 5460,3093.79 5473.79,3080 P?.1 5761.68,3073.32 v1(5761.68,2753.25) ; P?.5 6036.21,3480 6045,3488.79 6045,4571.21 6036.21,4580 P?.16 ; S2.1@5830,2080 5593.79,2080 5493.51,2180.29 5243.3,2180.29 C32.1@5122.48,2301.1 ; 1341,3070 1221.42,3070 1551.42,3400 1638.58,3400 1638.58,3453.58 1695,3510 1818.58,3510 1903.58,3425 1903.58,3477 1922.29,3495.71 2457.48,3495.71 C13.2@2461.42,3491.77 ; 1875,3685 1986.29,3685 ; 1875,3685 1736.72,3685 1710,3711.72 1710,3838.28 1736.56,3864.84 1822.56,3864.84 1889.84,3864.84 1905,3880 ; 1905,3880 1905,3940 ; 1905,3880 1986.29,3798.71 1986.29,3685 ; 1905,3940 1905,4024.52 ; 1986.29,3685 2310,3685 2390,3765 2487.17,3765 2487.17,3692.98 ; C13.2@2461.42,3491.77 2461.42,3615 2487.17,3640.75 2487.17,3692.98 ; C13.2@2461.42,3491.77 2514.43,3491.77 2666.79,3339.41 2666.79,3304.53 2776.32,3195 ; 2776.32,3195 2827.17,3195 2872.17,3150 2894,3150 2894,3099 3156.42,3099 3156.42,3445 ; 3156.42,3445 3156.42,3461.42 3180.78,3485.78 3219.36,3485.78 3225,3491.42 3580,3491.42 3585,3496.42 C27.2@3970,3496.42 ; C27.2@3970,3496.42 C28.2@4363.58,3496.42 ; C28.2@4363.58,3496.42 4434.55,3496.42 4443.34,3487.63 4443.34,3191.66 4460,3175 4820,3175 4945,3050 ; 4695,2315 4765,2245 4988,2245 5053,2310 C32.1@5113.58,2310 ; 4945,3050 5445,2550 5445,2309.89 5436.21,2301.1 C32.1@5122.48,2301.1 ; C32.1@5113.58,2310 C32.1@5122.48,2301.1
  Top Layer w20: R3.2 2425,1257.95 R1.1@2425,1607.24 ; R1.1 2836.76,1622.24 2974,1485 ; C2.2@2960,1816.42 3020.51,1816.42 3032.23,1804.7 3032.23,1543.23 2974,1485 ; C2.2@2990,1819.02 2990,2338.58 3175,2523.58 3178.94,2519.65 3428.93,2519.65 3682.7,2265.88 3803.72,2265.88 3822.83,2285 3867.6,2285 C29.2@3880,2272.6 ; C3.1@3025,1086.18 3004.49,1106.69 2988.01,1106.69 2974,1120.71 2974,1485 ; C29.2@3863.19,2285 3943.19,2365 4306.42,2365 4335,2336.42 4335,2688.11 4361.89,2715 4403.28,2715 4415,2726.72 Reg?.2@4415,2799.45
  Top Layer w80: D3.2 D4.2 5023.73,1012.2 5070.59,965.34 C1.2
  Bottom Layer w15: v1(990,4205) 990,4486.21 998.79,4495 1436.21,4495 1445,4486.21 1445,4279.08 v1(1556.35,4167.72) 1556.35,4818.65 J?.2 ; v1@2844.15,4339.27 v1(2844.15,4340) 2844.15,4349.47 2822.97,4370.64 2822.97,4682.97 WIFI.1 ; v1(2906.79,3650) 2906.79,3711.79 v1(2945,3750) 2952.5,3750 3042.5,3660 v1(3050,3660) ; v1(3260,3840) 3260,3735 3455,3540 3455,3115 3467.5,3102.5 4640,3102.5 4648.79,3111.29 4648.79,3251.21 v1(4645,3255) ; v1(4465,2050) 4465,1815 Optocoupler1.2 ; S1.1 5375,4571.21 5383.79,4580 P?.16 ; v1(5460,3490) 5465,3485 5750,3485 P?.5 ; v1(5761.68,2753.25) 6021.21,2753.25 6030,2762.03 6030,2866.21 6038.79,2875 Contrast.3
  Bottom Layer w20: Optocoupler1.2 4915,1365 Optocoupler1.4
CF1: "Metering Chip?.18" D?.1 MCU?.29 | length 2935
  Top Layer w15: v1(1960,4235) 1960,3948.7 2018.27,3890.43 2087.44,3890.43 2181.72,3890.43 2185.46,3886.7 2203.3,3886.7 v1(2210,3880) ; v1(1980.43,4998.6) 1980.43,5146.54 D?.1 ; v1(3005,3790) 3011.7,3796.7 3011.7,3811.17 3014.53,3814 MCU?.29
  Bottom Layer w15: v1(1960,4235) 1638.79,4235 1630,4243.79 1630,4648.17 v1(1980.43,4998.6) ; v1(2210,3880) 2210,3889.47 2238.45,3917.92 2238.45,3923.24 2260.21,3945 2775,3945 2905,3815 2970.53,3815 2995.53,3790 v1(3005,3790)
Contactor: MCU?.26 Rb.2 | length 4486.7
  Top Layer w12: MCU?.26 3073.58,4126.21 3082.37,4135 3452.6,4135 3477.6,4160 v1(3560,4160)
  Top Layer w20: v1(3515,2675) 3520,2680 3520,3175 3535,3190 v1(3620,3190) ; v1(4605,1815) 4613.12,1815 4628.12,1830 4721.26,1830 4775.35,1775.91 Rb.2
  Bottom Layer w20: v1(3515,2675) 4563.28,2675 4605,2633.28 v1(4605,1815) ; v1(3560,4160) 3620,4100 v1(3620,3190)
CS: "Metering Chip?.24" MCU?.38 | length 1416.3
  Top Layer w12: v1(2260,4235) 2450.19,4235 2555.19,4130.01 2650.19,4130.01 2748.41,4031.78 2748.41,3813.79 2758.61,3803.59 MCU?.38
  Top Layer w15: 2087.44,4043.98 2363.85,4043.98 2394.87,4075 v1(2400,4075)
  Bottom Layer w15: v1(2260,4235) 2393.3,4101.7 2393.3,4081.7 v1(2400,4075)
GND_LCD: 
I1N: "Metering Chip?.11" C9.1 R14.2 | length 2291.4
  Top Layer w15: v1(1493.93,3816.78) 1615.89,3816.78 1689.55,3890.43 1822.56,3890.43
  Top Layer w20: R14.2 1454.85,2370.5 1576.66,2370.5 C9.1 1698.28,2367.17 1710,2378.88 1710,2860 1710.44,2860.44 v1(1710.44,2867.93)
  Bottom Layer w20: v1(1493.93,3816.78) 1490,3812.85 1490,3560 1495,3555 1698.72,3555 1710.44,3543.28 v1(1710.44,2867.93)
I1P: "Metering Chip?.10" C10.2 R15.2 | length 1688.8
  Top Layer w20: v1(1444.52,3893.65) 1618.65,3893.65 1641.02,3916.02 1822.56,3916.02 ; v1(1451.7,2870) 1450,2868.3 R15.2 1460,2720 C10.2
  Bottom Layer w20: v1(1444.52,3893.65) 1448.11,3890.06 1448.11,2873.59 v1(1451.7,2870)
I2N: "Metering Chip?.8" C3.2 R4.1 | length 7588
  Top Layer w20: v1(930,3850) 716.72,3850 705,3838.28 705,1160 990,875 2788.28,875 2800,886.72 2800,1205 ; v1(1300,3840) 1427.2,3967.2 1822.56,3967.2 ; R4.1 2634.65,1214.65 ; C3.2 3158.28,1174.02 3170,1162.3 3170,1006.72 3158.28,995 3010,995 2800,1205 ; 2634.65,1214.65 2634.65,1268.28 2646.36,1280 2725,1280 2755,1250 ; 2634.65,1214.65 2670,1250 2755,1250 ; 2755,1250 2800,1205
  Bottom Layer w20: v1(930,3850) 940,3840 v1(1300,3840)
I2P: "Metering Chip?.7" C2.1 R2.1 | length 5115.2
  Top Layer w20: v1(1311.83,3946.82) 1357.8,3992.8 1822.56,3992.8 ; v1(2310,1850) 2612.24,1850 R2.1 2614.65,1796.54 2650,1761.18 2962.4,1761.18 C2.1
  Bottom Layer w20: v1(1311.83,3946.82) 1307.69,3946.82 1270.87,3910 791.72,3910 780,3898.28 780,2821.72 791.72,2810 1865,2810 2310,2365 v1(2310,1850)
IRQ: "Metering Chip?.20" MCU?.21 | length 1741.7
  Top Layer w15: 2087.44,3941.61 2087.72,3941.89 2156.89,3941.89 v1(2160,3945) ; MCU?.21 3311.21,3764.21 3405,3858 v1(3405,3970)
  Bottom Layer w15: v1(2160,3945) 2161.29,3945 2186.29,3970 v1(3405,3970)
L1: K1.COM R15.1 Shunt2.2 Shunt3.2 SHUNT.2 | length 7746.3
  Top Layer w80: v1(905,1290) 807.95,1387.05 SHUNT.2 Shunt2.2 807.95,2943.14 854.82,2990 1109.29,2990 R15.1
  Bottom Layer w80: v1(905,1290) 925,1270 5205,1270 5440,1505 K1.COM
L2: K1.NC Output.2 | length 4729.4
  Bottom Layer w80: Output.2 1760,675 3333.94,675 3781.65,1122.72 4188.35,1122.72 5498.78,1122.72 5604.84,1228.78 K1.NC
Line: Input.2 pad.37 R14.1 Shunt2.1 Shunt3.1 SHUNT.1 Trans_9V.51 | length 5672.6
  Top Layer w80: Shunt3.1 Shunt2.1 SHUNT.1 ; Input.2 1620,2085 1620,2097.43 1507.43,2210 1098.91,2210 1052.05,2256.86 SHUNT.1 ; R14.1 1057.05,2385 SHUNT.1 ; Trans_9V.51 2864.31,844.31 3314.31,844.31 3365,895 3365,1275 3265,1375 pad.37
  Bottom Layer w80: Input.2 1320,1605 1550,1375 pad.37
MMD0: "Metering Chip?.28" MCU?.22 | length 3110.6
  Top Layer w12: 2087.44,4146.34 2108.38,4146.34 2185,4222.96 2185,4336.21 2253.79,4405 3747.58,4405 3838.08,4314.5 3849.5,4303.08 3849.5,4134.5 3755,4040 3347.03,4040 3340,4032.97 3340,3840 3283.9,3783.9 MCU?.22
MMD1: "Metering Chip?.1" MCU?.25 | length 3285
  Top Layer w12: MCU?.25 3093.27,4101.21 3102.05,4110 3701.21,4110 3725,4133.79 3725,4281.56 3716.21,4290.35 3676.11,4290.35 v1(3670,4296.46)
  Top Layer w20: v1(1709.83,4294.18) 1705,4289.35 1705,4170.05 1728.71,4146.34 1803.39,4146.34
  Bottom Layer w20: v1(1709.83,4294.18) 1715.57,4288.44 1733.11,4288.44 1736.55,4285 3650.43,4285 3661.88,4296.46 v1(3670,4296.46)
NetC14_1: "Metering Chip?.13" C14.1 C15.1 | length 3052.6
  Top Layer w20: v1(1105,3665) 1105,3133.58 C15.1 ; v1(1335,3660) 1715,3660 1730,3645 2020,3645 v1(2070,3595) 2077.5,3595 2112.5,3630 v1(2120,3630) ; 1822.56,3839.25 1893.28,3839.25 1910,3822.54 v1(1910,3730) ; v1(1917.91,2956.98) 2080.56,2956.98 C14.1
  Bottom Layer w20: v1(1105,3665) 1330,3665 v1(1335,3660) ; v1(1910,3730) 2020,3730 v1(2120,3630) ; v1(1917.91,2956.98) 1915,2959.88 1915,3195 2053.51,3195 2075,3216.49 2075,3590 v1(2070,3595)
NetC16_2: C16.2 MCU.2 MCU?.5 | length 448.8
  Top Layer w14: MCU?.5 2955.47,3303.29 2978.77,3280 MCU.2 2985,3271.56 2970.51,3257.07 2970.51,3185.51 C16.2@2968.98,3183.98 ; C16.2@2968.98,3183.98 C16.2 C16.2@2968.98,3183.98
NetC17_1: C17.1 MCU.1 MCU?.6 | length 463.2
  Top Layer w14: MCU?.6 2975.12,3556.5 2975.12,3395.9 3029.63,3341.39 3045.65,3341.39 MCU.1 3107.05,3271.56 3091.02,3255.54 3091.02,3167.44 C17.1
NetC21_2: "Metering Chip?.22" C21.2 Chip.2 | length 674.1
  Top Layer w15: 2087.44,3992.8 2128.82,3992.8 2130,3993.98 2171.13,3993.98 2265,3900.1 2265,3880.08 2310,3835.08 Chip.2 2315,3773.98 2372.02,3831 2535.58,3831 2544.37,3822.21 2544.37,3800.63 C21.2
NetC22_2: "Metering Chip?.23" C22.2 Chip.1 | length 445.7
  Top Layer w15: 2115,4018.98 2187.05,4018.98 Chip.1 2429.61,3896.02 2449.66,3916.08 2449.66,3941.08 C22.2
NetD1_2: D1.2 D3.1 Trans_9V.53 | length 1833.2
  Top Layer w80: v1(3934.38,846.58) v1(3934.38,1385.72) ; D3.1 D1.2
  Bottom Layer w80: v1(3934.38,846.58) 3932.8,845 3753.79,845 3745,836.21 3745,225 3765,205 Trans_9V.53 ; v1(3934.38,1385.72) 3936.45,1387.8 D3.1
NetD2_2: D2.2 D4.1 Trans_9V.52 | length 3775.3
  Top Layer w80: D4.1 D2.2 ; v1(4575,1390) 4575,1235.78 4630.78,1180 5268.14,1180 5315,1133.14 v1(5315,740)
  Bottom Layer w80: Trans_9V.52 4213.14,515 4260,468.14 4260,260.65 4306.86,213.79 5268.14,213.79 5315,260.65 v1(5315,740) ; D4.1 4287.2,1390 v1(4575,1390)
NetD5_2: D5.2 K1.A2 Optocoupler1.5 | length 1346.2
  Bottom Layer w80: Optocoupler1.5 5227.2,1465 D5.2 5365,1833.14 5411.86,1880 5966.38,1880 6085.16,1761.22 K1.A2
NetD?_2: D?.2 R40.2 | length 287.6
  Top Layer w15: D?.2 2174.45,5288.9 2239.65,5354.09 R40.2
NetJ?_1: J?.1 MCU?.1 | length 5019.9
  Top Layer w14: v1(2860,3410) 2860,3419.74 2876.73,3436.47 MCU?.1
  Bottom Layer w15: J?.1 1235,4123.04 1421.89,3936.15 1698.11,3936.15 1755,3879.26 1755,2978.04 1860,2873.04 3253.92,2873.04 3315,2934.12 3315,3084.64 3306.21,3093.43 2506.57,3093.43 2481.21,3118.79 2481.21,3131.21 2680,3330 2780,3330 v1(2860,3410)
NetOptocoupler1_1: Optocoupler1.1 Rb.1 | length 399.1
  Top Layer w20: Rb.1 4689.65,1775 4635,1775 4613.32,1753.32 4613.32,1707.15 4755.47,1565 Optocoupler1.1
NetR1_2: R1.2 R2.2 T1.1 | length 1639.8
  Top Layer w80: T1.1 2067.6,1692.6 2219,1692.6 2229.35,1702.95 ; R1.2 2232.05,1702.95 2145,1790 2145,2113.28 2156.72,2125 2683.64,2125 2695.35,2113.28 R2.2
NetR3_1: R3.1 R4.2 T1.3 | length 790.1
  Top Layer w80: T1.3 2082.76,1172.24 R3.1 2420,1116 2450,1086 2676.35,1086 2715.35,1125 R4.2
NetR6_1: R6.1 R7.1 | length 152.1
  Top Layer w20: R6.1 2150,2649.65 R7.1
NetR7_2: R7.2 R8.2 | length 157.1
  Top Layer w20: R7.2 2445,2730.35 R8.2
NetR8_1: R8.1 R9.1 | length 145
  Top Layer w20: R8.1 R9.1
NetR9_2: R9.2 R10.2 | length 135
  Top Layer w20: R9.2 R10.2
NetR10_1: R10.1 R11.1 | length 172.1
  Top Layer w20: R10.1 2735,2639.65 R11.1
NetR11_2: R11.2 R12.1 | length 343.5
  Top Layer w20: R11.2 3070,2720.35 3139.65,2790 R12.1
NetRPU_1: 
Neutral: Input.1 Output.1 pad.34 pad.35 R6.2 Trans_9V.50 | length 6631
  Top Layer w80: Input.1 1170,1885 1170,1515 Output.1 ; pad.34 1800,1610 1800,2677.14 1846.86,2724 2143.65,2724 R6.2 ; Trans_9V.50 3536.21,205 3545,213.79 3545,1448.14 3493.14,1500 v1(3270,1500)
  Bottom Layer w80: Input.1 1695,1660 1695,1505 pad.34 ; pad.35 2333.98,1511.04 2361.09,1511.04 2361.53,1511.04 2361.84,1511.04 cw(c2361.09,1431.04) 2362.1,1511.03 3253.94,1501.19 3268.81,1501.19 v1(3270,1500)
PA1: MCU?.11 P?.4 | length 2888.7
  Top Layer w14: MCU?.11 3073.58,3503.79 3097.37,3480 3110,3480 3195,3565 4002.61,3565 v1(4042.29,3604.68)
  Bottom Layer w20: v1(4042.29,3604.68) 4266.98,3380 P?.4
PA3: MCU?.13 P?.6 | length 2739.3
  Top Layer w12: MCU?.13 3456.73,3606.73 3594.5,3744.5 v1(4205,3744.5)
  Bottom Layer w15: v1(4205,3744.5) 4208.1,3747.6 5587.4,3747.6 P?.6
PA4: MCU?.14 P?.11 | length 2799.4
  Top Layer w12: MCU?.14 3441.42,3626.42 3605,3790 4212.72,3790 4226.32,3803.6 v1(4235.79,3803.6)
  Bottom Layer w15: v1(4235.79,3803.6) 4482.19,4050 5724.19,4050 5754.19,4080 P?.11
PA5: MCU?.15 P?.12 | length 2832.7
  Top Layer w12: MCU?.15 3421.1,3646.1 3597,3822 4172,3822 v1(4235,3885)
  Bottom Layer w15: v1(4235,3885) 4450.1,4100.1 5675.1,4100.1 P?.12
PA6: MCU?.16 P?.13 | length 2865.8
  Top Layer w12: MCU?.16 3400.79,3665.79 3582,3847 ; 3582.18,3846.82 3582.36,3847 4097,3847 4226.41,3976.41 4226.94,3976.41 4240.53,3990 v1(4250,3990)
  Bottom Layer w15: v1(4250,3990) 4394.13,4134.13 5609.13,4134.13 P?.13
PA7: MCU?.17 P?.14 | length 2899.2
  Top Layer w12: MCU?.17 3385.47,3685.47 3572,3872 4017,3872 4198.91,4053.91 4223.91,4053.91 v1(4230,4060)
  Bottom Layer w15: v1(4230,4060) 4525.3,4355.3 5082.46,4355.3 5092.16,4365 5728.08,4365 5743.08,4380 P?.14
PA13: MCU?.34 PA13&14.1 | length 3630.9
  Top Layer w12: MCU?.34 2916.1,4008.9 2895,4030 2895,4185 2930,4220 3600,4220 v1(3650,4170)
  Top Layer w20: v1(4940,3710) 4940,4370 PA13&14.1
  Bottom Layer w15: v1(3650,4170) 3650,3703.79 3678.79,3675 4905,3675 v1(4940,3710)
PA14: MCU?.37 PA13&14.2 | length 7365.2
  Top Layer w12: v1(2615,4190) 2618.59,4186.41 2648.59,4186.41 2773.41,4061.59 2773.41,3962.87 2777.19,3959.09 2777.19,3833.59 2787.5,3823.27 MCU?.37
  Top Layer w20: v1(4600,4250) 4600,3580 4670,3510 4740,3510 4850.96,3620.96 4850.96,4363.34 4958.23,4470.61 5049.39,4470.61 PA13&14.2
  Bottom Layer w20: v1(2615,4190) 2620.74,4195.74 2645.44,4195.74 2706.06,4256.36 4010.75,4256.36 4132.29,4377.9 5073.09,4377.9 5087.15,4391.95 5087.15,4417.15 PA13&14.2 ; v1(4600,4250) 4605.74,4255.74 4630.44,4255.74 4704.7,4330 5862.82,4330 5902.4,4369.58 5902.4,4406.56 5875.89,4433.07 5127.23,4433.07 5127.01,4432.85 5117.03,4432.85 5102.85,4432.85 PA13&14.2 ; PA13&14.2@5117.03,4425 5103.07,4425 PA13&14.2
PB8: MCU?.45 RPU.1 S2.2 | length 6118.4
  Top Layer w15: v1(2735,3705) 2735,3704.76 2773.52,3666.23 2826.09,3666.23 MCU?.45 ; v1(3395,3235) 3393.31,3233.31 3393.31,2887.47 3430.52,2850.26 v1(3430.52,2842.03) ; v1(5872.78,2902.42) 5872.78,2332.78 S2.2 6171.21,2295 6180,2303.79 6180,2415.35 RPU.1
  Bottom Layer w15: v1(2735,3705) 2735,3849.31 2723.87,3860.45 2423.31,3860.45 2404.53,3841.66 2404.53,3829.23 2513.31,3720.45 2513.31,3469.23 2522.1,3460.45 3313.31,3460.45 3393.31,3380.45 3393.31,3236.69 v1(3395,3235) ; v1(3430.52,2842.03) 3430.97,2842.48 3600.34,2842.48 3752.87,2995 4791.63,2995 4883.76,2902.87 5872.33,2902.87 v1(5872.78,2902.42)
PB9: MCU?.46
Reset: "Metering Chip?.4" MCU?.28 | length 3211.9
  Top Layer w12: MCU?.28 3034.21,4186.21 3043,4195 3408.71,4195 3426.21,4177.5 v1(3435,4177.5)
  Top Layer w20: v1(1433.33,4040.74) 1462.15,4069.57 1822.56,4069.57
  Bottom Layer w15: v1(1433.33,4040.74) 2325.36,4040.74 2359.1,4007 3260.18,4007 3430.68,4177.5 v1(3435,4177.5)
ResetM: C4.1 MCU?.7 R5.1 S1.2 | length 5662.9
  Top Layer w14: MCU?.7 2994.84,3465.16 v1(3050,3410)
  Top Layer w20: S1.2 5411,4659 5560.35,4659 ; v1(5485,3930) 5489.49,3934.49 5489.49,4418.07 5530.51,4459.09 5549.28,4459.09 5561,4470.81 5561,4659 5561,4710 R5.1
  Bottom Layer w20: v1(3050,3410) 3175,3410 3285,3300 3285,3215 3440,3060 4845,3060 4940,2965 5898.28,2965 5910,2976.72 5910,3917.81 5897.81,3930 v1(5485,3930)
RTC1: C50.1 MCU?.3 XTAL.2 | length 588
  Top Layer w14: C50.1 2663.27,3579.4 2686.62,3579.4 XTAL.2 2730,3475 2837,3368 2900.32,3368 2916.1,3383.79 MCU?.3
RTC2: C51.1 MCU?.4 XTAL.1 | length 763
  Top Layer w14: XTAL.1 2799.98,3344 2920.21,3344 2935.79,3359.57 MCU?.4
  Top Layer w15: C51.1 2548.58,3310.52 v1(2551.55,3313.49)
  Bottom Layer w15: v1(2551.55,3313.49) 2652.04,3413.98 XTAL.1
RX: MCU?.31 WIFI.5 | length 918.6
  Top Layer w12: v1(2945,4100) 2945,4035 2975.16,4004.84 MCU?.31
  Top Layer w15: v1(2850,4100) 2850,4175.36 2925.42,4250.78 2925.42,4337.19 v1@2925.84,4337.61
  Bottom Layer w15: v1(2850,4100) v1(2945,4100) ; WIFI.5 2870,4515 v1(2925,4460)
  Bottom Layer w20: v1(2925,4460) 2925.42,4459.58 2925.42,4338.03 v1@2925.84,4337.61
  other v1: 2925.84,4340
SCLK: "Metering Chip?.25" MCU?.39 | length 1033.4
  Top Layer w12: v1(2640,4070) 2643.58,4066.42 2673.77,4066.42 2725.19,4015.01 2725.19,3792.51 2733.97,3783.72 2826.36,3783.72 MCU?.39
  Top Layer w15: 2087.44,4069.57 2213.28,4069.57 2223.95,4080.23 2238.3,4080.23 v1(2245,4086.93)
  Bottom Layer w15: v1(2245,4086.93) 2304.63,4086.93 2325.82,4065.74 2349.16,4065.74 2382.4,4032.5 2417.6,4032.5 2438.33,4053.23 2613.75,4053.23 2630.53,4070 v1(2640,4070)
SDI: "Metering Chip?.26" MCU?.41 | length 1030.9
  Top Layer w12: 2087.44,4095.16 2135.34,4095.16 2169.61,4129.43 2475.41,4129.43 2619.83,3985.01 2629.99,3985.01 2631.04,3983.96 2666.4,3983.96 2675.19,3975.17 2675.19,3773.36 2704.01,3744.53 MCU?.41
SDO: "Metering Chip?.27" MCU?.40 | length 1055.4
  Top Layer w12: 2087.44,4120.75 2087.72,4121.03 2109.69,4121.03 2109.87,4121.2 2121.38,4121.2 2165.19,4165.01 2475.19,4165.01 2630.19,4010.01 2691.4,4010.01 2700.19,4001.22 2700.19,3775.93 2711.9,3764.22 MCU?.40
TX: MCU?.30 WIFI.4 | length 3779.9
  Top Layer w12: v1@2962.1,4166.61 2994.84,4133.87 MCU?.30
  Top Layer w15: v1(3500,3970) 3573,3897 3977,3897 3990,3910 3990,4317.02 v1(3991.13,4318.15)
  Bottom Layer w15: v1@2962.1,4166.61 3229.28,4166.61 3287.67,4225 3483.21,4225 3500,4208.21 v1(3500,3970) ; WIFI.4 3172.17,4727.83 3190,4727.83 3361.21,4727.83 3370,4719.05 3370,4460 3345,4435 3113.79,4435 3095.26,4416.47 v1(3095.26,4350.34) 3956.15,4350.34 3988.34,4318.15 v1(3991.13,4318.15)
  other v1: 2955,4166.61
V0: Contrast.2 P?.3 | length 890
  Top Layer w15: P?.3 5755,3270.36 5780.76,3244.6 6081.21,3244.6 6090,3235.82 6090,2780 6098.79,2771.21 6156.21,2771.21 Contrast.2
V5: C56.2 REG_5V.3 VCC_Switch.1 | length 1064.6
  Top Layer w15: C56.2 5005,5317.83 REG_5V.3 5755,5390 VCC_Switch.1
VCC_LCD: Contrast.1 P?.2 P?.15 VCC_Switch.2 | length 3582.5
  Top Layer w15: P?.15 5613.46,4480 5604.67,4471.21 5604.67,3750.55 5605,3750.22 5605,3180 P?.2 5965,2970 v1(5965,2665) ; VCC_Switch.2 5925,5285 5960,5250 v1(5960,4940)
  Bottom Layer w15: P?.15 5948.61,4480 5960,4491.39 v1(5960,4940) ; v1(5965,2665) 5974.47,2665 5988.35,2678.88 6156.12,2678.88 Contrast.1
VDD_1: 3.3&GND.1 "Metering Chip?.3" "Metering Chip?.5" C11.2 C12.2 C23.1 C24.1 C25.1 C26.1 C27.1 C28.1 C31.1 C32.2 C53.1 D6.1 MCU?.9 MCU?.24 MCU?.36 MCU?.48 R5.2 Reg?.1 RPU.2 VCC_Switch.3 WIFI.6 WIFI.8 | length 22275.2
  Top Layer w12: v1(2735,4340) 2775,4300 2775,4084.18 2790.51,4068.67 2790.51,3999.49 2876.73,3913.27 2876.73,3750.8 2948.77,3678.77 ; MCU?.48 2926.73,3606.73 2973.77,3653.77 ; MCU?.9 3034.21,3593.32 2973.77,3653.77 ; v1@3270,3920 3173.27,3823.27 3093.27,3823.27 2948.77,3678.77 ; 2948.77,3678.77 2973.77,3653.77
  Top Layer w15: C53.1 1166.63,3998.58 1263.21,4095.16 1345.16,4095.16 ; v1(1235,3340) 1230,3345 1230,3980 1345.16,4095.16 ; 1822.56,4095.16 1434.84,4095.16 ; 1841.73,4045.75 1852.54,4045.75 1866.73,4059.94 1866.73,4079.19 1852.53,4093.39 1841.73,4093.39 ; v1(2083.55,4371.58) 2081.98,4370 1825,4370 1825,4430.52 1821.64,4433.88 ; WIFI.6 2972.2,4627.8 2972.2,4530 ; WIFI.8 3170,4577.85 3122.15,4530 2972.2,4530 ; 3.3&GND.1 4430,4360.23 4494.04,4296.19 v1(4494.04,3257) ; C31.1@5127.17,2030 v1(5525,2030) ; VCC_Switch.3 5760,4873.79 5751.21,4865 5480,4865 5462.3,4847.3 5462.3,4741.8 5462.54,4741.56 5462.54,4727.11 R5.2 5479.65,4763.01 5488.43,4771.8 6211.21,4771.8 6220,4763.01 6220,2625 6094.65,2499.65 RPU.2 v1(5960,2420) ; 1345.16,4095.16 1434.84,4095.16 ; 1434.84,4095.16 1348.28,4181.72 1348.28,4198.28 1583.88,4433.88 1821.64,4433.88 ; 1821.64,4433.88 1917.75,4530 2972.2,4530
  Top Layer w20: v1(1375,3150) 1378.73,3146.27 1773.28,3146.27 1785,3157.98 1785,3342.68 1736.93,3390.75 1736.93,3394.49 C11.2@1720.15,3411.27 ; C11.2 C11.2@1720.15,3411.27 ; Reg?.1 4357.32,2792.95 4357.32,2810.2 4265,2902.52 4265,3163.28 4276.72,3175 4356.87,3175 4368.58,3186.72 4368.58,3221.42 ; D6.1 5137.48,2403.9 C32.2 4874.67,2391.42 4862.95,2403.13 4862.95,2560.38 4874.67,2572.1 5017.9,2572.1 ; v1(5339.35,2575.83) 5335.61,2572.1 5017.9,2572.1 ; C11.2@1720.15,3411.27 1832,3411.27 1858,3385.27 1949.27,3385.27 1960.99,3396.98 1960.99,3419.57 C12.2 2001.93,3419.49 2001.93,3415.75 2347.68,3070 3218.28,3070 3230,3081.72 C23.1 3233.73,3429.85 3401.27,3429.85 C24.1 3408.73,3429.85 3581.27,3429.85 C25.1 3785,3433.58 C26.1 3793.73,3434.85 3966.27,3434.85 C27.1 3973.73,3434.85 4364.85,3434.85 C28.1 4368.58,3221.42 ; 4368.58,3221.42 5017.9,2572.1
  Bottom Layer w15: v1(2083.55,4371.58) 2090.13,4365 2705.98,4365 2730.98,4340 v1(2735,4340) ; v1@3270,3920 3480,3710 3480,3140 3490,3130 4485.25,3130 4494.04,3138.79 v1(4494.04,3257) ; v1(5339.35,2575.83) 5525,2390.18 ; v1(5525,2030) 5525,2390.18 ; v1(5960,2420) 5957.65,2420 5933.71,2443.94 5578.76,2443.94 5525,2390.18
  Bottom Layer w20: v1(1235,3340) 1370,3205 1370,3155 v1(1375,3150)
  other v1: 3260,3920
VIN: C1.1 C29.1 C30.2 C55.2 D1.1 D2.1 D5.1 K1.A1 Reg?.3 REG_5V.1 | length 12378.8
  Top Layer w60: D2.1 D1.1 4064.8,1857.99 4063.43,1857.99 4061.43,1860 3755.15,1860 3720,1824.85 3720,690.15 3755.15,655 C1.1 4519.41,413.02 4561.21,371.21 4565,375 5409.85,375 5445,410.15 5445,1147.2 5364.8,1227.4 5364.8,1459.96 4909.8,1914.96 4345.04,1914.96 4156.97,2103.03 4156.97,2292.6 4164.37,2300 C29.1 4189.57,2292.6 4251.52,2292.6 4265.07,2279.05 4339.53,2279.05 C30.2 4340.47,2278.58 4340.51,2278.54 4438.91,2278.54 4474.06,2313.69 Reg?.3 ; 4494.8,2770.83 4518.98,2795 v1(4595,2795) ; v1(4725,3570) 4670,3625 4670,5115.76 4705.15,5150.91 4779.49,5150.91 4805,5176.42 REG_5V.1 ; v1(4996.72,3252.76) 5179.42,3435.46 v1(5179.42,3525.41) ; v1(5190,3060) 5370.56,2879.44 v1(5370.56,2797.4)